# Altium PCB Nixie_PSU.PcbDoc
Units mm, origin at the board's own origin, x right, y up, seen from the top; angles counter-clockwise.
Board outline 60.35 x 20 mm, 2 copper layers (Top Layer, Bottom Layer), stack 1.557 mm thick; 14 components, 9 nets, 41 pads, 26 vias.
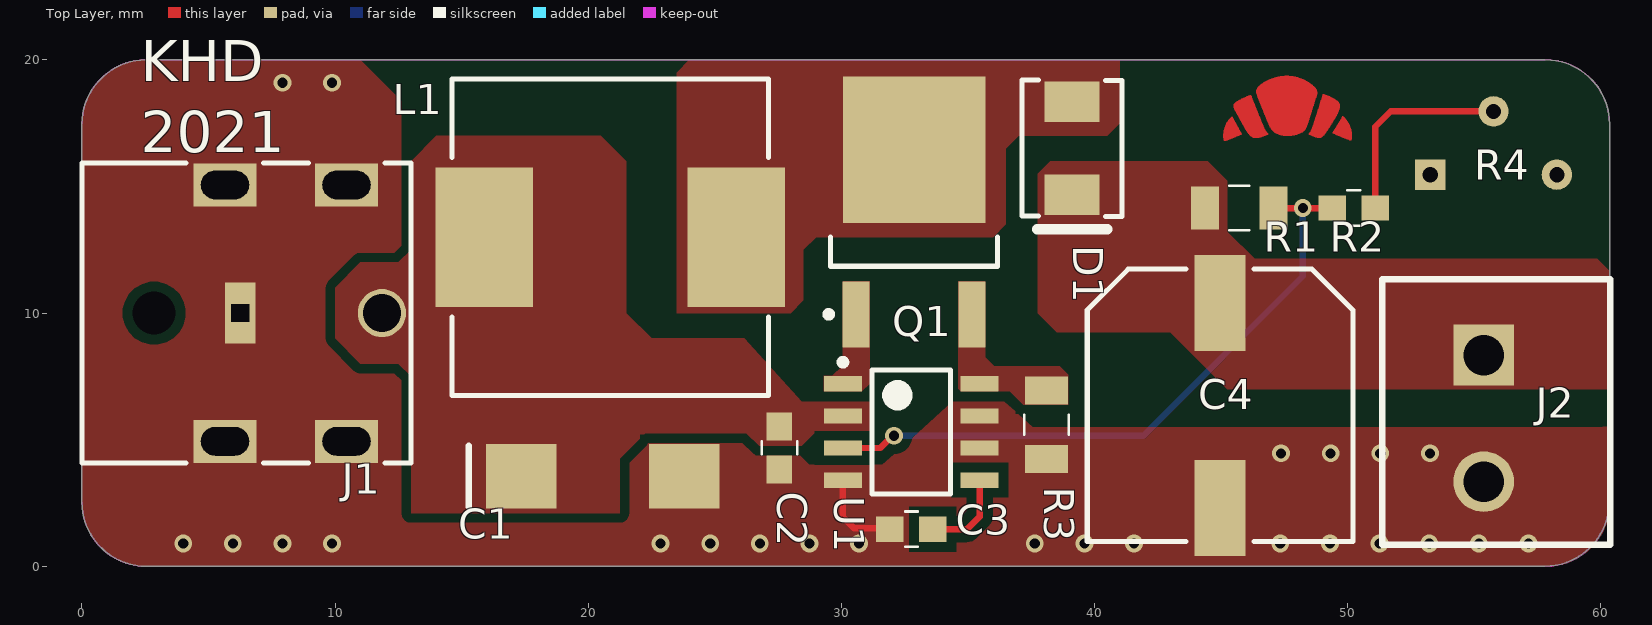
[diagram p0: Top Layer view]
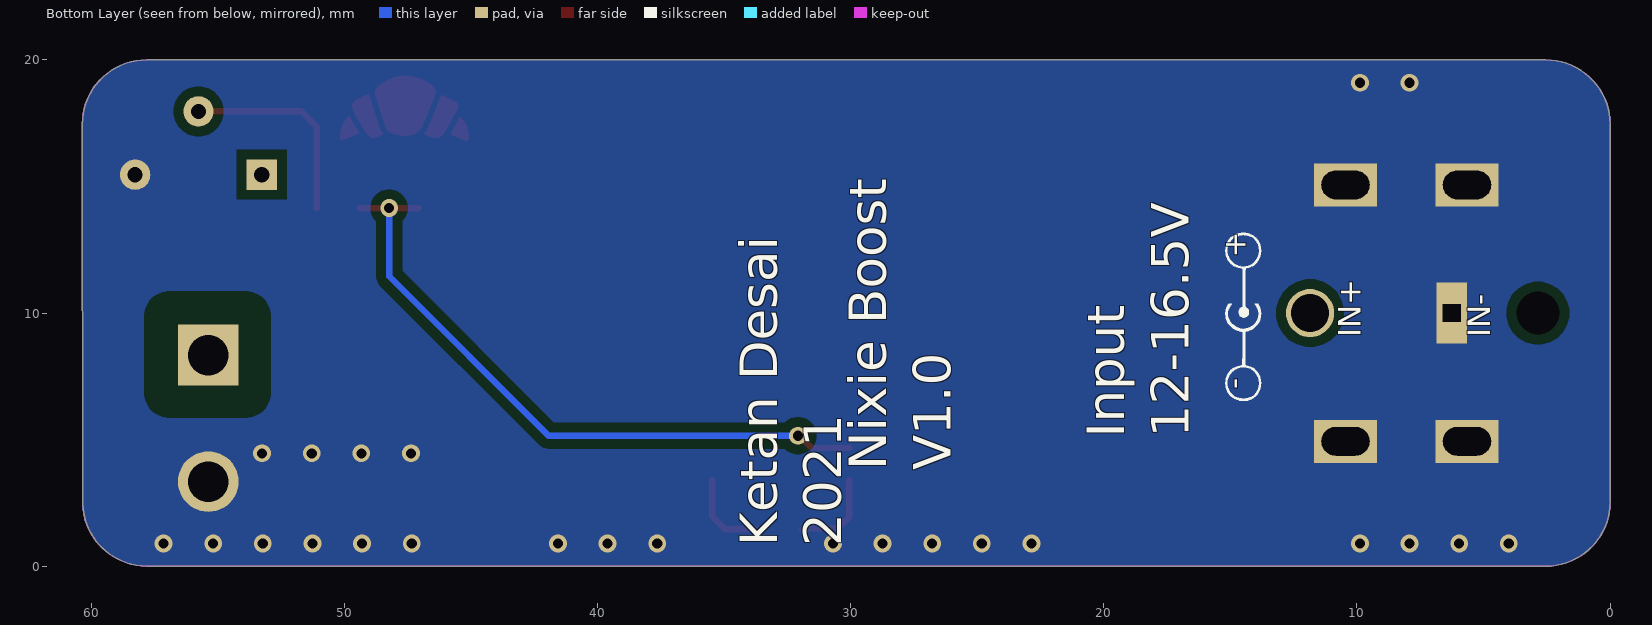
[diagram p1: Bottom Layer view, seen from below]
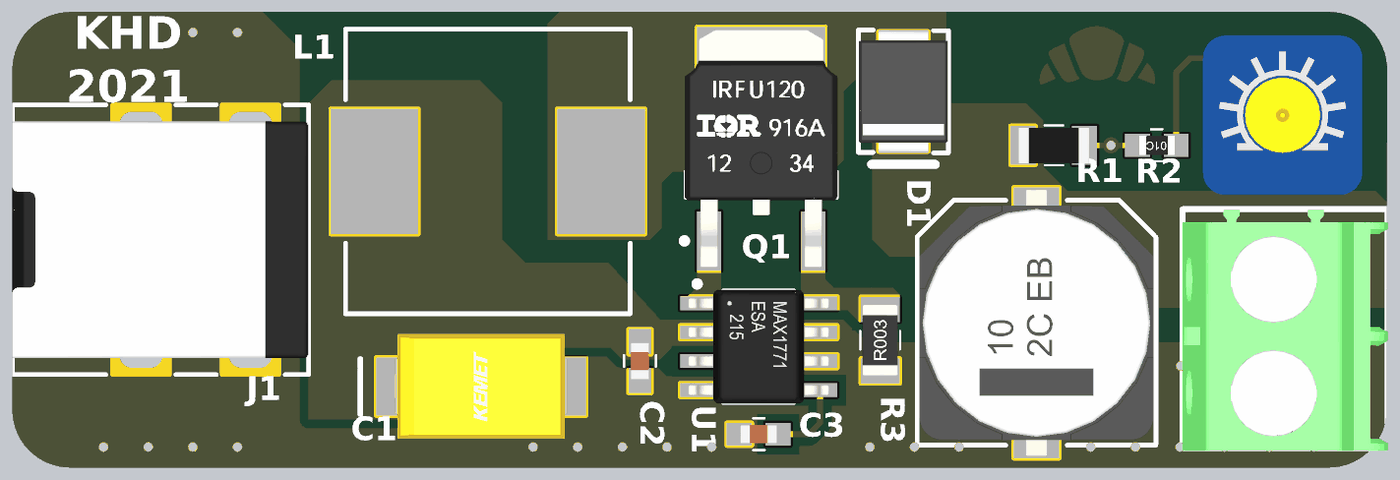
[diagram p2: 3D render of the assembled board from above, using the file's embedded part models]

## Layer stack, top to bottom
Top Solder: solder mask 0.0102, Solder Resist, Dk 3.5
Top Layer: signal copper 0.0356
Dielectric 1: dielectric 1.4859, FR-4, Dk 4.8
Bottom Layer: signal copper 0.0356
Bottom Solder: solder mask 0.0102, Solder Resist, Dk 3.5

## Board outline
60.326,2.688 cw(c57.79,2.54) 57.79,0 2.54,0 cw(c2.54,2.54) 0,2.54 0,17.46 cw(c2.54,17.46) 2.54,20 56,20 57.81,20 cw(c57.81,17.46) 60.35,17.46

## Design rules (kind name [scope] priority, off if disabled: settings)
Clearance Clearance_5 [InNamedPolygon('NONET_L-01_P-001')] p1: gap=0.381 ignorepadtopadclearanceinfootprint=FALSE
Clearance Clearance_4 [InNamedPolygon('NONET_L-01_P-001')] p2: gap=0.508 ignorepadtopadclearanceinfootprint=FALSE
Clearance Clearance_3 [InNamedPolygon('NONET_L-01_P-001')] p3: gap=0.254 ignorepadtopadclearanceinfootprint=FALSE except(0: Arc-Hole Track-Hole SMDPad-Hole THPad-Hole Via-Hole Fill-Hole Poly-Hole Region-Hole Text-Hole)
Clearance Clearance_2 [InNamedPolygon('NONET_L-01_P-001')] p4: gap=15 ignorepadtopadclearanceinfootprint=FALSE
Clearance Clearance_1 [InNamedPolygon('NONET_L-01_P-001')] p5: gap=0.889 ignorepadtopadclearanceinfootprint=FALSE
Clearance Q [InNamedPolygon('NONET_L-01_P-001')] p6: gap=0.635 ignorepadtopadclearanceinfootprint=FALSE
Clearance [All] p7: gap=0.254 ignorepadtopadclearanceinfootprint=FALSE except(0: Arc-Hole Track-Hole SMDPad-Hole THPad-Hole Via-Hole Fill-Hole Poly-Hole Region-Hole Text-Hole)
PlaneConnect [All] p1: planeconnectstyle=Direct reliefexpansion=0.508 reliefentries=4 reliefconductorwidth=0.254 reliefairgap=0.254
PolygonConnect PolygonConnect_2 [All vs IsNamedPolygon('NONET_L-01_P-001')] p1: connectstyle=Direct reliefconductorwidth=0.254 reliefentries=4 polygonreliefangle="90 Angle" airgapwidth=0.254
PolygonConnect PolygonConnect_1 [All vs IsNamedPolygon('NONET_L-01_P-001')] p2: connectstyle=Direct reliefconductorwidth=0.254 reliefentries=4 polygonreliefangle="90 Angle" airgapwidth=0.254
PolygonConnect [All] p3: connectstyle=Direct reliefconductorwidth=0.254 reliefentries=4 polygonreliefangle="90 Angle" airgapwidth=0.254
RoutingVias [All] p1: holewidth=0.511 width=1 viastyle="Through Hole" minholewidth=0.4 minwidth=0.7 maxholewidth=0.711 maxwidth=1.27
SolderMaskExpansion [All] p1: expansion=0.102 istentingtop=FALSE
Width [All] p1: maxlimit=0.254 minlimit=0.254 preferedwidth=0.254
29 further rules are at their usual default settings.

## Components (designator, comment, footprint, x,y, rotation, side; value= is the part's Value field where it differs from the comment)
C1 "TPSD107M020R0150" C2917 20.574,3.556 r0 top value=100uF
C2 "C0603 100nF 50V X7R" C0603-IPC 27.55,4.67 r90 top value=100nF
C3 "C0603 100nF 50V X7R" C0603-IPC 32.762,1.462 r0 top value=100nF
C4 "EEV-EB2E100Q" C-SMD-Polarized-10x10.2x17mm 44.958,6.35 r270 top value=10uF
D1 "ES2F-E3" DO-214AA 39.116,16.51 r270 top
J1 "DC-042C-2.5" "DC-042C-2.5 THT BARREL JACK" 0,10 r90 top
J2 "Phoenix Contact 1935161" Phoenix_1935161 55.372,5.842 r270 top
L1 "DR125-101-R" EATN-DR125_V 20.872,13 r0 top
Q1 "IRFR3910TRLPBF" "DPAK2 IRFR3910" 32.872,14 r90 top
R1 "RC1206JR-071M2L" R1206-IPC 45.72,14.148 r180 top value=1.2M
R2 "R0603 10K 1%" R0603-IPC-10K 50.241,14.148 r180 top value=10k
R3 "CSNL1206FT50L0" R1206-IPC-0R050 38.1,5.588 r90 top value=0.050
R4 "Trimmer 10k 1%" CT-6EP 53.264,15.469 r0 top value=10k
U1 "MAX1771CSA" "SOIC-8N - MAX1771" 32.762,5.305 r0 top

## Footprints (in the part's own frame and the unit in brackets; to place one, negate y for a bottom-side part, rotate by r counter-clockwise, add the part's x,y. Pads: shape width x height; smd on the part's side, far side on the other; paste and mask are expansions set on the pad)
C0603-IPC [mm]
  rect 1.1x1 smd: 1(-0.85,0) 2(0.85,0)
  silkscreen extent -0.24,-0.7 0.26,0.7, body extent -0.8,-0.4 0.8,0.4, height 0.3
C2917 [mm]
  rect 2.77x2.55 smd: 1(-3.22,0) 2(3.22,0)
  silkscreen extent -5.3,-1.2 -5.3,1.2, body extent -3.8,-2.3 3.8,2.3, height 4.31
C-SMD-Polarized-10x10.2x17mm [mm] "Aluminum Electrolytic Capacitor, IPC Low Density"
  rect 3.8x2 smd: 1(-4.05,0) 2(4.05,0)
  silkscreen extent -5.39,-5.25 5.37,5.25, body extent -5.85,-5.15 5.85,5.15, height 16.5
CT-6EP [mm] "Copal Electronics Trimmer"
  rect 1.2x1.2 hole 0.6: 1(0,0)
  round 1.2 hole 0.6: 2(2.5,2.5) 3(5,0)
  body extent -1,-3.5 6,3.5, height 5.81
"DC-042C-2.5 THT BARREL JACK" [mm] "CONN PWR JACK 2.5mm SOLDER"
  rect 1.7x2.5 hole 1.13 slot 1.9 at 90 deg: 2(-5.065,-5.65) 2(-5.065,-10.45) 2(5.065,-5.65) 2(5.065,-10.45)
  rect 2.4x1.2 hole 0.7 square: 3(0,-6.25)
  round 1.9 hole 1.5: 4(0,-11.85)
  round 0 hole 1.7 unplated: G(0,-2.85)
  silkscreen extent -5.92,-13 5.92,0, body extent -5.2,-13 5.2,0, height 10
DO-214AA [mm]
  rect 1.6x2.18 smd: 1(1.84,0) 2(-1.836,0)
  silkscreen extent -2.7,-1.97 3.2,1.97, body extent -2.7,-1.95 2.7,1.95, height 2.5
"DPAK2 IRFR3910" [mm] "D-PAK, 3-Pads, Body 6.15x6.65mm (max), IPC Medium Density"
  rect 2.6x1.06 smd: 1(-4.05,2.29) 3(-4.05,-2.29)
  rect 5.8x5.632 smd: 2(2.45,0)
  silkscreen extent -4.17,-3.3 -1,3.49, body extent -5.21,-3.36 5.21,3.36, height 2.39
EATN-DR125_V [mm] "SMD, 2-Leads, Body 12.5x12.5mm"
  rect 3.85x5.5 smd: 1(-4.975,0) 2(4.975,0)
  silkscreen extent -6.25,-6.25 6.25,6.25, body extent -6.25,-6.25 6.25,6.25, height 6
Phoenix_1935161 [mm] "Phoenix Contact 1935161 2-pos terminal block"
  rect 2.4x2.4 hole 1.6: 1(-2.5,0)
  round 2.4 hole 1.6: 2(2.5,0)
  silkscreen extent -5.5,-4 5,5, body extent -5.48,-4 5.08,5, height 11.41
R0603-IPC-10K [mm] "10K 0603 Resistor"
  rect 1.1x1 smd: 1(-0.85,0) 2(0.85,0)
  silkscreen extent -0.25,-0.7 0.25,0.7, body extent -0.77,-0.43 0.78,0.43, height 0.44
R1206-IPC [mm]
  rect 1.1x1.7 smd: 1(-1.35,0) 2(1.35,0)
  silkscreen extent -0.4,-0.87 0.4,0.87, body extent -1.55,-0.77 1.55,0.78, height 0.55
R1206-IPC-0R050 [mm]
  rect 1.1x1.7 smd: 1(-1.35,0) 2(1.35,0)
  silkscreen extent -0.4,-0.87 0.4,0.87, body extent -1.55,-0.77 1.55,0.78, height 0.55
"SOIC-8N - MAX1771" [mm] "SOIC, 8-Leads, Body 4.90x3.90mm, Pitch 1.27mm, IPC Medium Density"
  rect 1.5x0.6 smd: 1(-2.7,1.905) 2(-2.7,0.635) 3(-2.7,-0.635) 4(-2.7,-1.905) 5(2.7,-1.905) 6(2.7,-0.635) 7(2.7,0.635) 8(2.7,1.905)
  silkscreen extent -2.82,-2.45 1.55,2.88, body extent -3.1,-2.5 3.1,2.5, height 1.76

## Part data
C1: library part "C2917 100uF 25V TANT", "CAP TANT 100UF 25V 10% 2917", Supplier Part Number 1=478-TPSD107M020R0150CT-ND, Supplier 1=Digi-Key, Supplier 2=Mouser, Supplier Part Number 2=581-TPSD107M020R0150
C2 C3: "CAP CER 0.1UF 50V X7R 0603", Max. Voltage=50V, Ratings=AEC-Q200, Supplier Part Number 1=490-5798-1-ND, EIA Code=X7R, Features="Soft Termination", Supplier 1=Digi-Key
C4: library part "C-SMD 10uF 250V Electrolytic", "10 µF 250 V Aluminum Electrolytic Capacitors Radial, Can - SMD - 4000 Hrs @ 105°C", Supplier Part Number 1=PCE3432CT-ND, Voltage=250V, Supplier 1=Digi-Key, Supplier 2=Mouser, Supplier Part Number 2=667-EEV-EB2E100Q
D1: "Diode Standard 300 V 2A 35ns Trr Surface Mount DO-214AA (SMB)", Supplier Part Number 1=ES2F-E3/5BTGICT-ND, Supplier 1=Digi-Key, Supplier 2=Mouser, Supplier Part Number 2=625-ES2F-E3/5BT
J1: library part "DC Barrel Jack 2.5 x 5.5mm THT", "DC Power Receptacle Jack 8A 2.5mm DIP AC/DC Power Plugs & Receptacles", Current Rating=8A, Voltage Rating=24V, Inside Contact Diameter=2.5mm, Supplier 3=LCSC, Supplier Part Number 3=C319121
J2: library part "Term Block 2pos", "Terminal Block, 2 Position, 5mm pitch, 18A, 300V, 12-26 AWG", Manufacturer="Phoenix Contact", Manufacturer Part Number=1935161, Supplier Part Number 1=277-1667-ND, Supplier 1=Digi-Key
L1: library part CMP-2000-06178-1, "High Power Density, High Efficiency, Shielded Inductor, 100 uH, 1.78 A, -40 to 125 degC, 2-Pin SMD, RoHS, Tape and Reel", Case Size/Dimension=12.5x12.5x6mm, DC Resistance=0.17O, Inductance-Nom=100µH, Manufacturer=EATON, Package Description="2-Pin Surface Mount Device, Body 12.5 x 12.5 mm", Package Reference=DR125, Rated Current-Max=1.78A, Tolerance (%)=±20%, Datasheet URL=https://ciiva.com/datasheet-click-3083294?src=ciiva&sig=4634c5cd, Datasheet Version=04/2014, Manufacturer URL=http://www.eaton.com/, Mounting Technology=SurfaceMount, Shielding=Yes
Q1: "N-Channel 16A (Tc) 79W (Tc) Surface Mount D-Pak", Supplier Part Number 1=IRFR3910TRLPBFCT-ND, Supplier 1=Digi-Key, Supplier 2=Mouser, Supplier 3=LCSC, Supplier Part Number 2=942-IRFR3910TRLPBF, Supplier Part Number 3=C148158
R1: library part "R1206 1.2M 1%", "1.2 MOhms ±5% 0.25W, 1/4W Chip Resistor 1206 (3216 Metric) Moisture Resistant Thick Film", Supplier Part Number 1=311-1.2MERCT-ND, Supplier 1=Digi-Key, Supplier 2=Mouser, Supplier Part Number 2=603-RC1206JR-071M2L
R2: "RES SMD 10K OHM 1% 1/10W 0603", Supplier Part Number 1=RMCF0603FT10K0CT-ND, Supplier 1=Digi-Key
R3: library part "R1206 0R050 1%", "RES 0.05 OHM 1% 1W 1206", Supplier Part Number 1=CSNL1206FT50L0CT-ND, Supplier 1=Digi-Key
R4: library part "Trimmer 100k 1%", "Trimmer, 10k, 1 Turn, Thru-Hole, Cermet, 100ppm/C"
U1: "Boost, Buck-Boost Regulator Positive Output Step-Up, Step-Up/Step-Down - DC-DC Controller IC 8-SOIC", Supplier Part Number 1=MAX1771CSA+-ND, Supplier 1=Digi-Key, Supplier 2=Mouser, Supplier 3=LCSC, Supplier Part Number 2=700-MAX1771CSA, Supplier Part Number 3=C407903

## Via types
v1: diameter 0.7, hole 0.4, Top Layer to Bottom Layer, tented both sides, 26 vias

## Nets (pads, with @x,y where several pads share a name; then routed paths per layer and width w, separated by ;. In a path a pad name is that pad's centre, name@x,y a point inside that pad or via, vN(x,y) a via of type N, cw(c..) or ccw(c..) an arc to the next point about the centre after c; other vN are vias at no path point)
GND: C1.2 C2.1 C3.1 C4.2 J1.2 J1.3 J2.2 R3.1 R4.3 U1.4 U1.6 U1.7 | length 3.5
  Top Layer w0.254: U1.4 30.062,1.938 30.5,1.5 31.874,1.5 C3.1
  other v1: 4,0.9 5.96,0.9 7.921,0.9 9.881,0.9 22.858,0.9 24.819,0.9 26.779,0.9 28.74,0.9 30.7,0.9 37.641,0.9 39.601,0.9 41.562,0.9 47.34,0.9 49.3,0.9 51.26,0.9 53.221,0.9 55.181,0.9 57.142,0.9 47.367,4.458 49.328,4.458 51.288,4.458 53.249,4.458 7.921,19.1 9.881,19.1
HVOUT: C4.1 D1.1 J2.1 R1.2
NetC3_2: C3.2 U1.5 | length 3.5
  Top Layer w0.254: C3.2 34.962,1.462 35.462,1.962 U1.5
NetD1_2: D1.2 L1.2 Q1.2
NetQ1_1: Q1.1 U1.1
NetQ1_3: Q1.3 R3.2 U1.8
NetR1_1: R1.1 R2.2 U1.3 | length 26
  Top Layer w0.254: U1.3 31.533,4.67 32.019,5.156 v1(32.08,5.156) ; R1.1 v1(48.231,14.148) R2.2
  Bottom Layer w0.254: v1(32.08,5.156) 41.935,5.156 48.231,11.451 v1(48.231,14.148)
NetR2_1: R2.1 R4.2 | length 8.1
  Top Layer w0.254: R2.1 51.091,17.36 51.7,17.969 R4.2
VIN: C1.1 C2.2 J1.4 L1.1 U1.2
pads on no net: J1.G R4.1

## Polygon pours and split planes (outlines as drawn)
GND on Top Layer "NONET_L-01_P-001" (solid, pour order 8): 0,2.54 ccw(c2.54,2.54) 2.54,0 21.638,0 21.638,2.1 12.611,2.1 12.611,7.889 12.5,8 11,8 10,9 10,11 11,12 12.5,12 12.611,12.111 12.611,18.389 11,20 2.54,20 ccw(c2.54,17.46) 0,17.46
NetQ1_3 on Top Layer "NONET_L-01_P-001" (solid, pour order 3): 34.62,11.252 34.62,7.01 34.722,6.909 36.652,6.909 37.186,6.375 38.964,6.375 38.964,7.569 38.633,7.899 36.043,7.899 35.687,8.255 35.687,11.252
GND on Top Layer "NONET_L-01_P-001" (solid, pour order 6): 57.92,0 ccw(c57.886,2.444) 60.331,2.478 60.334,5.503 ccw(c60.293,2.9) 57.69,2.94 57,0
GND on Top Layer "NONET_L-01_P-001" (solid, pour order 5): 22.38,5.25 21.38,4.25 21.38,0 32.88,0 37.13,0 51.38,0 57.92,0 60.334,3.147 60.334,5.503 37.56,5.5 36.44,6.5 34.38,6.5 31.62,4 28.741,4 28.255,4.486 26.645,4.486 25.88,5.25
HVOUT on Top Layer "NONET_L-01_P-001" (solid, pour order 4): 38.25,16 37.75,15.5 37.75,10 38.5,9.25 43,9.25 45.25,7 60.33,7 60.33,11.67 59.859,12.141 46.33,12.141 45.25,13.221 45.25,15.227 44.477,16 42.25,16
NetQ1_1 on Top Layer "NONET_L-01_P-001" (solid, pour order 2): 30.81,6.909 31.115,7.214 31.115,11.252 30.048,11.252 30.048,7.925 29.642,7.518 29.312,7.518 29.312,6.909
NetD1_2 on Top Layer "NONET_L-01_P-001" (solid, pour order 1): 23.5,10 28,10 28.5,10.5 28.5,12.5 29,13 36,13 36.5,13.5 36.5,16.5 37,17 40.5,17 41,17.5 41,20 24,20 23.5,19.5
VIN on Top Layer "NONET_L-01_P-001" (solid, pour order 0): 10,11 11,12 12.5,12 13,12.5 13,16 14,17 20.5,17 21.5,16 21.5,10 22.5,9 26.159,9 28.432,6.5 31.2,6.5 31.2,5.25 28.928,5.25 28.428,4.75 26.75,4.75 26.25,5.25 22.25,5.25 21.25,4.25 21.25,2.1 13,2.1 13,7.5 12.5,8 11,8 10,9
GND on Bottom Layer "NONET_L-01_P-001" (solid, pour order 7): 0,17.46 cw(c2.54,17.46) 2.54,20 57.81,20 cw(c57.81,17.46) 60.35,17.46 60.35,2.54 cw(c57.81,2.54) 57.81,0 2.54,0 cw(c2.54,2.54) 0,2.54 0,4.293

## Keep-outs
Keep-Out Layer:
  lines w0.013: 60.332,2.688 60.332,2.688 ; -0.006,2.54 ccw(c0,2.54) -0.006,2.54 ; -0.006,2.54 ccw(c2.54,2.54) 2.54,-0.006 ; -0.006,2.54 ccw(c2.54,2.54) -0.006,2.54 ; -0.006,2.54 ccw(c0,2.54) -0.006,2.54 ; -0.006,2.54 -0.006,17.46 ; -0.006,17.46 cw(c2.54,17.46) 2.54,20.006 ; -0.006,17.46 -0.006,17.46 ; 2.54,-0.006 ccw(c2.54,0) 2.54,-0.006 ; 2.54,-0.006 ccw(c2.54,0) 2.54,-0.006 ; 2.54,-0.006 ccw(c2.54,0) 2.54,-0.006 ; 2.54,-0.006 57.79,-0.006 ; 2.54,20.006 ccw(c2.54,20) 2.54,20.006 ; 2.54,20.006 ccw(c2.54,20) 2.54,20.006 ; 2.54,20.006 ccw(c2.54,17.46) 2.54,20.006 ; 2.54,20.006 56,20.006 57.81,20.006 ; 57.79,-0.006 ccw(c57.79,2.54) 60.336,2.54 ccw(c57.79,2.54) 60.332,2.688 ; 57.79,-0.006 57.79,-0.006 ; 57.811,20.006 ccw(c57.81,17.46) 57.81,20.006 ; 57.811,20.006 cw(c57.81,17.46) 60.357,17.46 ; 57.811,20.006 ccw(c57.81,20) 57.81,20.006 ; 60.332,2.688 ccw(c57.79,2.54) 60.332,2.688 ; 60.332,2.688 60.357,17.46 ; 60.357,17.46 ccw(c57.81,17.46) 60.357,17.46 ; 60.357,17.46 ccw(c60.35,17.46) 60.357,17.46 ; 60.357,17.46 ccw(c60.35,17.46) 60.357,17.46 ; 60.357,17.46 ccw(c60.35,17.46) 60.357,17.46

## Other copper
Top Layer:
  region: 267 vertices and 0 holes, not listed, extent 45.092,16.804 45.81,17.751
  region: 270 vertices and 0 holes, not listed, extent 49.404,16.836 50.166,17.773
  region: 680 vertices and 0 holes, not listed, extent 46.398,17 48.794,19.373
  region: 483 vertices and 0 holes, not listed, extent 48.456,16.934 49.687,18.655
  region: 491 vertices and 0 holes, not listed, extent 45.495,16.923 46.856,18.611
Bottom Layer:
  pour cut-out: 52.905,6.865 52.905,9.865 cw(c53.905,9.865) 53.905,10.865 56.905,10.865 cw(c56.905,9.865) 57.905,9.865 57.905,6.865 cw(c56.905,6.865) 56.905,5.865 53.905,5.865 cw(c53.905,6.865)

## Silkscreen, mask and mechanical layers (free items; w line width, h text height)
Top Overlay:
  text "KHD / 2021" at 2.32,15.829 h2.79
Bottom Overlay:
  drawing of 2 lines, arcs and shapes, not listed
  text "+" at 14.101,12.177 h1.52 r270
  text "IN-" at 4.441,9.048 h1.52 r270
  text "IN+" at 9.547,9.053 h1.52 r270
  text "-" at 14.125,6.988 h1.52 r270
  text "Input  / 12-16.5V" at 16.154,5.081 h2.54 r270
  text "Nixie Boost / V1.0" at 25.552,3.785 h2.54 r270
  text "Ketan Desai / 2021" at 29.87,0.787 h2.54 r270
Bottom Solder:
  drawing of 5 lines, arcs and shapes, not listed